# Altium PCB MainBoard.PcbDoc
Units mm, origin at the board's own origin, x right, y up, seen from the top; angles counter-clockwise.
Board outline 101.6 x 68.58 mm, 2 copper layers (Top Layer, Bottom Layer), stack 1.671 mm thick; 35 components, 28 nets, 96 pads, 11 vias.
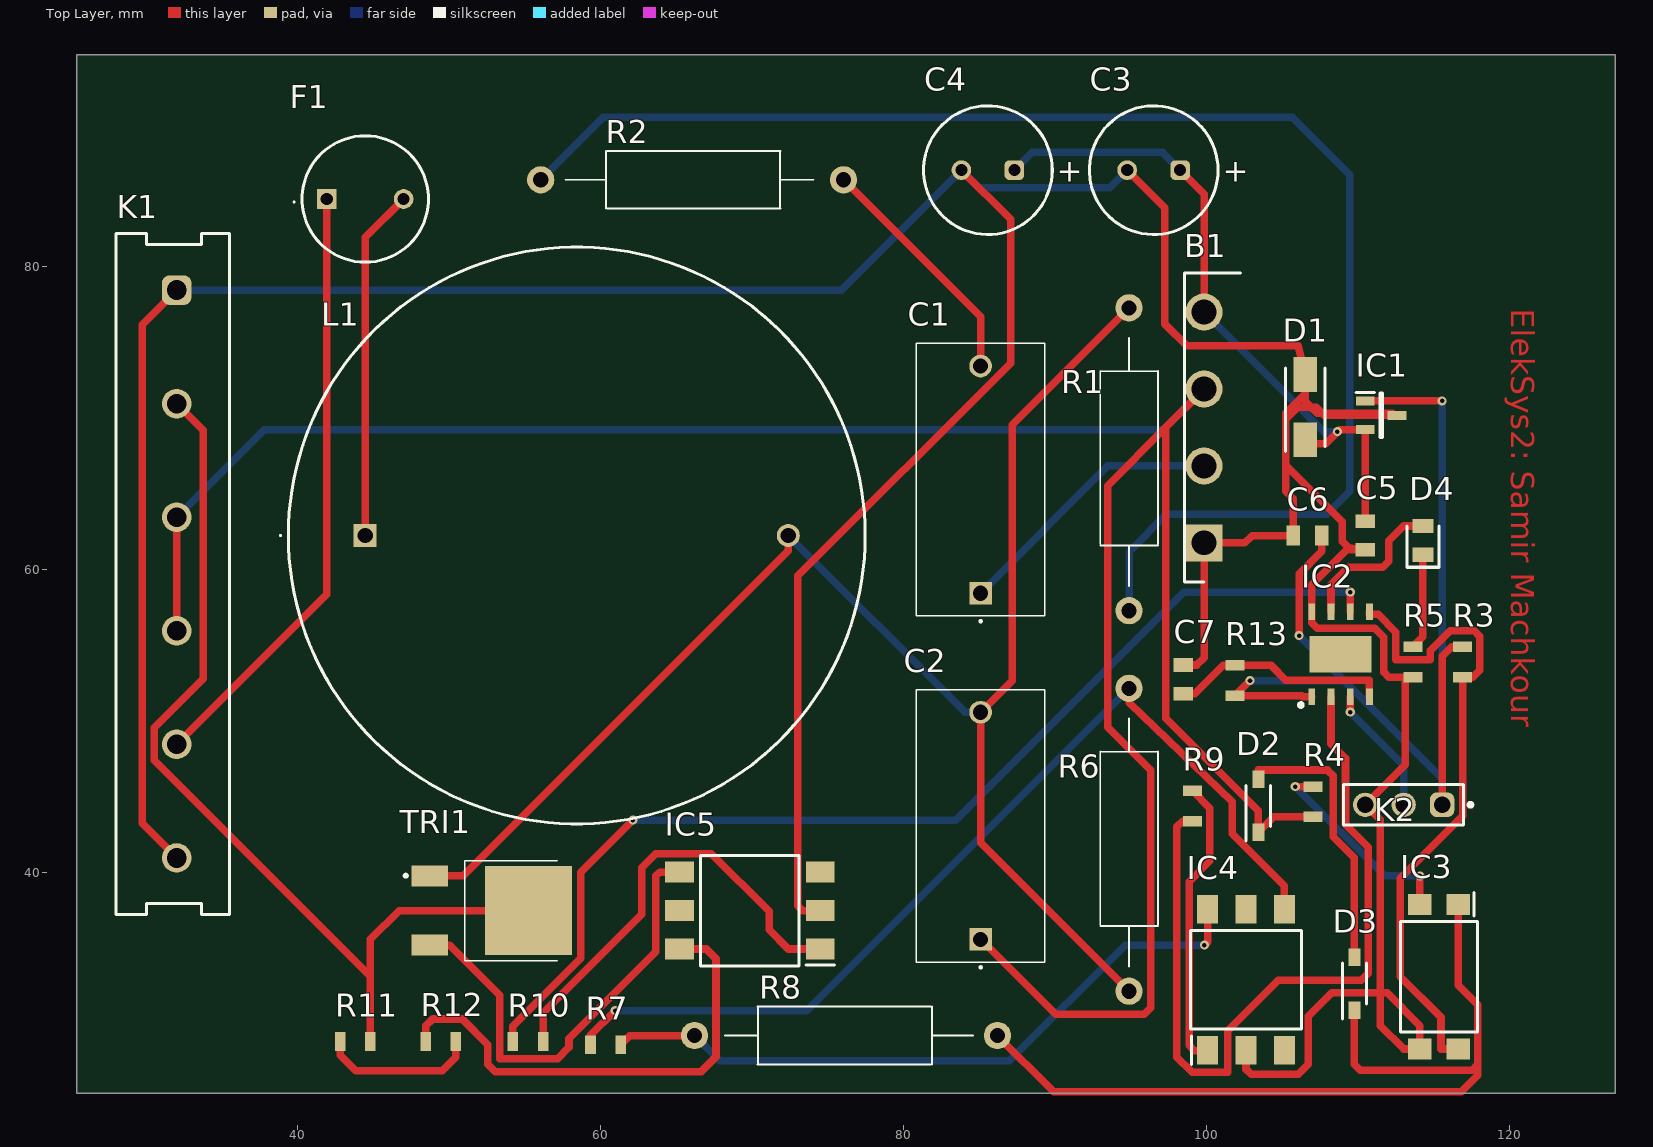
[diagram p0: Top Layer view]
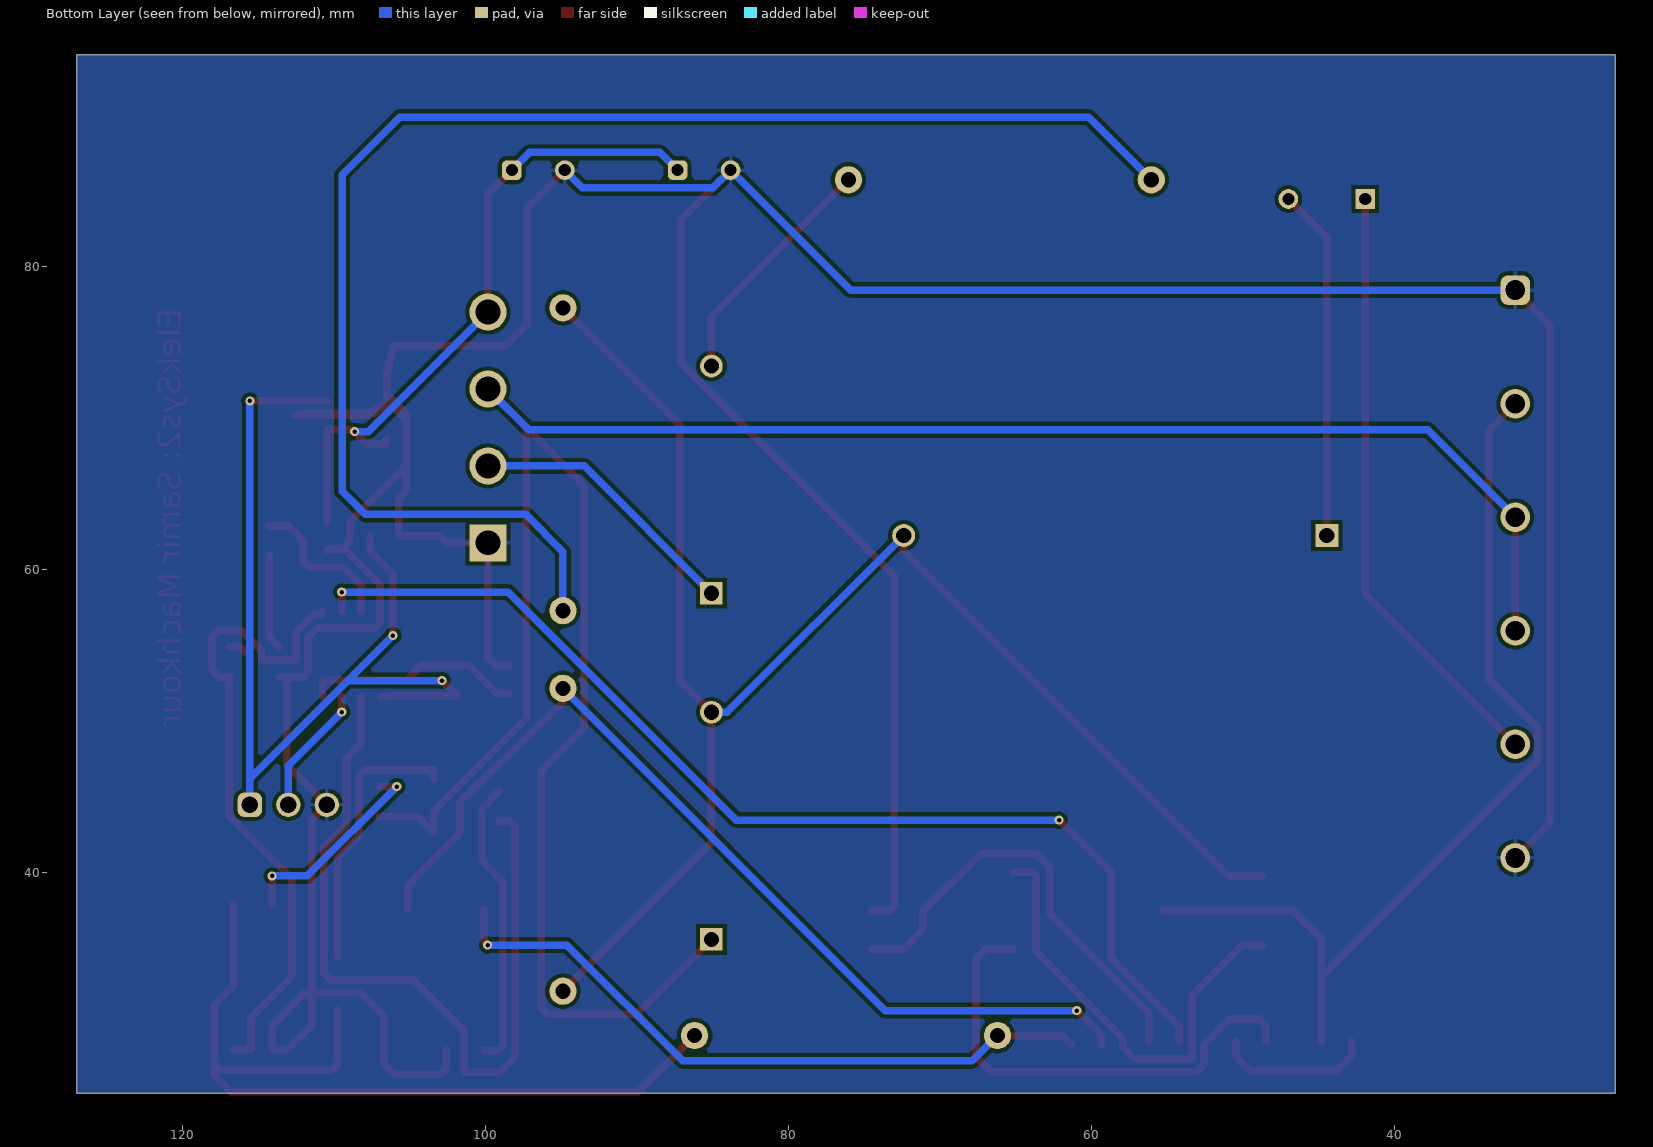
[diagram p1: Bottom Layer view, seen from below]
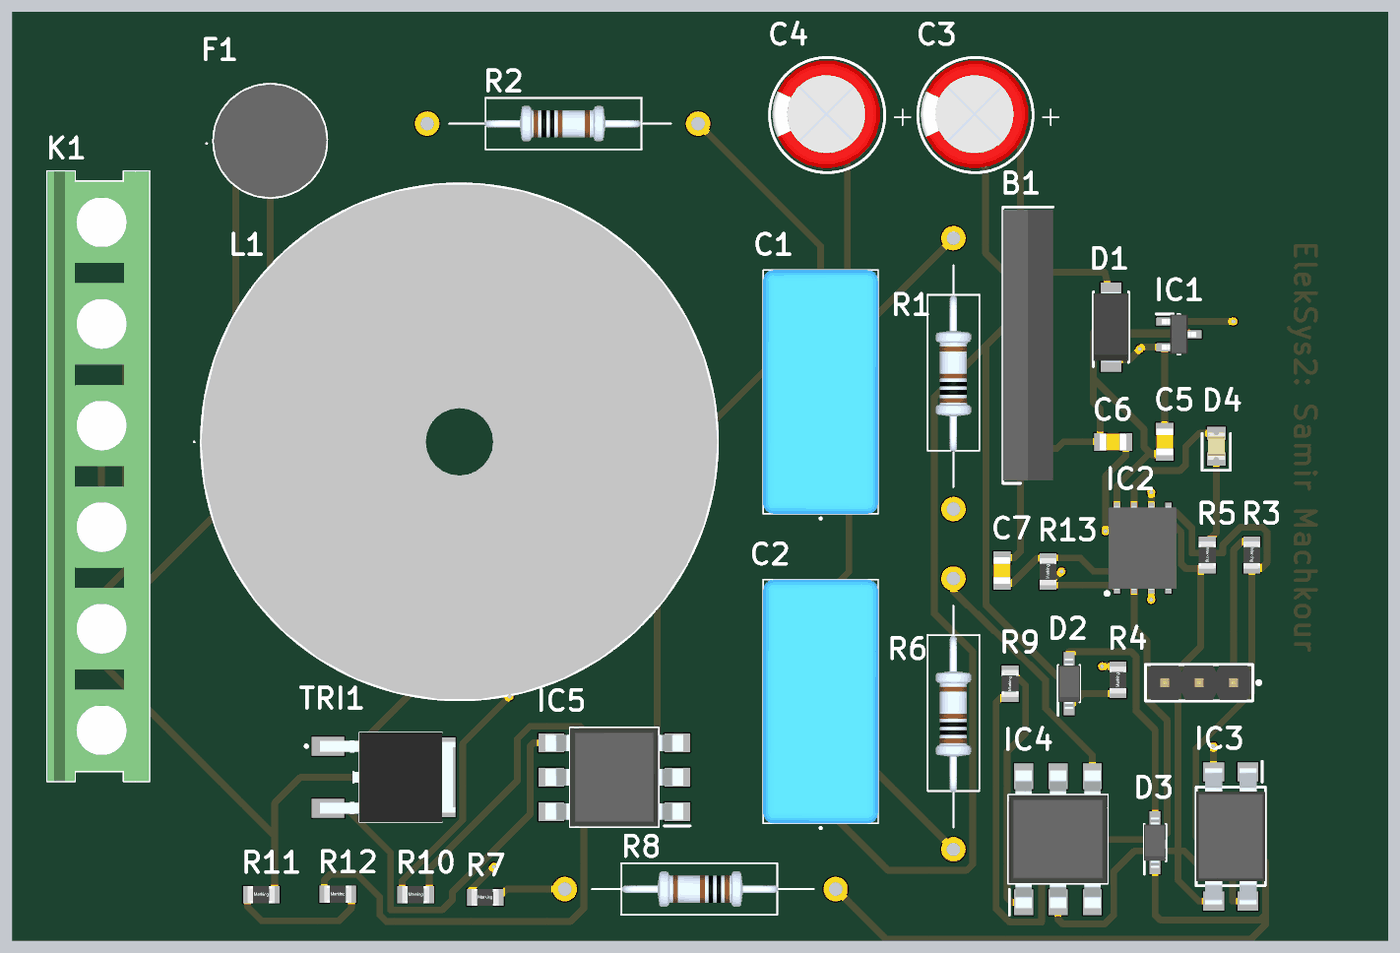
[diagram p2: 3D render of the assembled board from above, using the file's embedded part models]

## Layer stack, top to bottom
Top Solder: solder mask 0.0102, Solder Resist, Dk 3.5
Top Layer: signal copper 0.0356
Dielectric 1: dielectric 1.6, FR-4, Dk 4.8
Bottom Layer: signal copper 0.0356
Bottom Solder: solder mask 0.0102, Solder Resist, Dk 3.5

## Board outline
25.4,93.98 127,93.98 127,25.4 25.4,25.4

## Design rules (kind name [scope] priority, off if disabled: settings)
Clearance [All] p1: gap=0.254 ignorepadtopadclearanceinfootprint=FALSE except(0.3: Arc-Arc Arc-Track Track-Track)
PolygonConnect [All] p1: connectstyle=Relief reliefconductorwidth=0.254 reliefentries=4 polygonreliefangle="90 Angle" airgapwidth=0.254
RoutingVias [All] p1: holewidth=0.3 width=0.6 viastyle="Through Hole" minholewidth=0.3 minwidth=0.6 maxholewidth=0.3 maxwidth=0.6
SilkToSolderMaskClearance [IsPad] p1: minsilkscreentomaskgap=0.1 clearancetoexposedcopper=TRUE
SolderMaskExpansion [All] p1: expansion=0.102 istentingtop=FALSE
SupplyNets "Schematic Supply Nets_1" [InNet('GND')] p1: voltage=0.000
SupplyNets "Schematic Supply Nets" [InNet('+5')] p2: voltage=0.000
UnRoutedNet [All] p1: checkbadconnections=TRUE
Width [All] p1: maxlimit=1 minlimit=0.3 preferedwidth=0.5
28 further rules are at their usual default settings.

## Components (designator, comment, footprint, x,y, rotation, side; value= is the part's Value field where it differs from the comment)
B1 "" TO508P370X2000X1310-4P 99.847,61.747 r90 top
C1 "220N X2" B32932A_(18_x_8.5) 85.09,58.42 r90 top
C2 "220N X2" B32932A_(18_x_8.5) 85.09,35.56 r90 top
C3 "220uF" WCAP-ATG8_D8H11.5 96.52,86.36 r0 top
C4 "220uF" WCAP-ATG8_D8H11.5 85.57,86.36 r0 top
C5 "100nF" WCAP-CSGP_0805_L2W1.25H0.8_Reflow 110.49,62.23 r90 top
C6 "100nF" WCAP-CSGP_0805_L2W1.25H0.8_Reflow 106.68,62.23 r0 top
C7 "100nF" WCAP-CSGP_0805_L2W1.25H0.8_Reflow 98.476,52.73 r90 top
D1 "16V 0.5W" DIOM5226X220N 106.528,70.705 r90 top
D2 "0.5W 6.2V" "Zener Diodes ZEN REG 0.5W 6.2V" 103.429,44.376 r90 top
D3 "0.5W 6.2V" "Zener Diodes ZEN REG 0.5W 6.2V" 109.779,32.639 r90 top
D4 "LED GREEN" "LED 0805" 114.3,61.91 r90 top
F1 "FUSE" "FUSE MRT" 41.91,84.455 r0 top
IC1 "VOL REG" "Vol reg" 111.54,70.17 r0 top
IC2 "PIC12F629-I_MF" PIC12F629-I_MF 108.864,54.387 r90 top
IC3 "Optocoupler" "optocoupler smd" 115.367,33.096 r270 top
IC4 "optocoupler MOC3022S" "optoucoupler MOC3022S" 102.616,32.893 r90 top
IC5 "optocoupler MOC3022S" "optoucoupler MOC3022S" 69.85,37.465 r180 top
K1 "691137910006" 691137910006 31.75,59.69 r270 top
K2 "61300311121" "connector 3p M" 113.03,44.45 r180 top
L1 "2.2 mH" "2.2mH inductor" 44.45,62.23 r0 top
R1 "470 Ω 1W" RES_THT_1W 94.894,67.267 r90 top
R2 "470 Ω 1W" RES_THT_1W 66.04,85.725 r0 top
R3 "15K Ω" "Res 0805" 116.916,53.873 r270 top
R4 "10K Ω" "Res 0805" 107.036,44.653 r90 top
R5 "1k Ω" "Res 0805" 113.64,53.873 r270 top
R6 "15k Ω 1W" RES_THT_1W 94.894,42.139 r90 top
R7 "220k Ω" "Res 0805" 60.325,28.6 r0 top
R8 "15k Ω 1W" RES_THT_1W 76.2,29.21 r180 top
R9 "820 Ω" "Res 0805" 99.085,44.374 r90 top
R10 "820 Ω" "Res 0805" 55.194,28.804 r0 top
R11 "470 Ω" "Res 0805" 43.79,28.804 r0 top
R12 "470 Ω" "Res 0805" 49.438,28.829 r0 top
R13 "15k Ω" "Res 0805" 101.879,52.654 r90 top
TRI1 "BT137S-600,118" "triac bt137" 52.82,37.465 r270 top

## Footprints (in the part's own frame and the unit in brackets; to place one, negate y for a bottom-side part, rotate by r counter-clockwise, add the part's x,y. Pads: shape width x height; smd on the part's side, far side on the other; paste and mask are expansions set on the pad)
"2.2mH inductor" [mm] "1140222KRC"
  rect 1.519x1.519 hole 1.013: 1(0,0)
  round 1.519 hole 1.013: 2(27.94,0)
  silkscreen extent -5.65,-19.05 33.02,19.05, body extent -5.08,-19.05 33.02,19.05, height 26.14
691137910006 [mm] "Horizontal Cable Entry with Pressure Clamp, pitch 7.5mm, 06p"
  rrect50% 1.95x1.95 hole 1.3: 1(-18.75,0.25)
  round 1.95 hole 1.3: 2(-11.25,0.25) 3(-3.75,0.25) 4(3.75,0.25) 5(11.25,0.25) 6(18.75,0.25)
  silkscreen extent -22.5,-3.75 22.5,3.75, body extent -22.5,-3.75 22.5,3.75, height 11.52
B32932A_(18_x_8.5) [mm] "220N X2 safetycap"
  rect 1.5x1.5 hole 1: 1(0,0)
  round 1.5 hole 1: 2(15,0)
  silkscreen extent -1.9,-4.25 16.5,4.25, body extent -1.5,-4.25 16.5,4.25, height 14.55
"connector 3p M" [mm] "Pin Header, pitch 2.54 mm, THT, Vertical, single row, 3p"
  rrect50% 1.6x1.6 hole 1.1: 1(-2.54,0)
  round 1.6 hole 1.1: 2(0,0) 3(2.54,0)
  silkscreen extent -4.53,-1.34 3.96,1.34, body extent -3.81,-1.27 3.81,1.27, height 8.57
DIOM5226X220N [mm]
  rect 2.3x1.55 smd: 1(-2.15,0) 2(2.15,0)
  silkscreen extent -2.93,-1.3 2.6,1.3, body extent -2.61,-1.3 2.61,1.3, height 2.2
"FUSE MRT" [mm] "MRT16AMMO"
  rect 1.3x1.3 hole 0.8: 1(0,0)
  round 1.3 hole 0.8: 2(5.08,0)
  silkscreen extent -2.2,-4.18 6.71,4.18, body extent -1.62,-4.18 6.7,4.18, height 8
"LED 0805" [mm] "LEDC2012X80N"
  rect 0.95x1.4 smd: 1(-0.95,0) 2(0.95,0)
  silkscreen extent -1.77,-1.05 0.95,1.05, body extent -1,-0.63 1,0.63, height 0.8
"optocoupler smd" [mm] "SOP254P1005X410-4N"
  rect 1.4x1.55 smd: 1(-4.775,1.27) 2(-4.775,-1.27) 3(4.775,-1.27) 4(4.775,1.27)
  silkscreen extent -5.55,-2.55 3.65,2.55, body extent -5.02,-2.55 5.02,2.55, height 4.1
"optoucoupler MOC3022S" [mm] "SOT254P1016X460-6N"
  rect 1.9x1.4 smd: 1(-4.65,2.54) 2(-4.65,0) 3(-4.65,-2.54) 4(4.65,-2.54) 5(4.65,0) 6(4.65,2.54)
  silkscreen extent -5.6,-3.65 3.25,3.65, body extent -5.08,-3.65 5.08,3.65, height 4.6
PIC12F629-I_MF [mm] "SON127P600X500X100-9N-D"
  rect 1.1x0.45 smd: 1(-2.8,1.905) 2(-2.8,0.635) 3(-2.8,-0.635) 4(-2.8,-1.905) 5(2.8,-1.905) 6(2.8,-0.635) 7(2.8,0.635) 8(2.8,1.905)
  rect 2.4x4.1 smd: 9(0,0)
  silkscreen extent -3.47,2.5 -3.23,2.75, body extent -3.05,-2.5 3.05,2.5, height 1
"Res 0805" [mm] "Thick Film Resistors, SMT, body size 2x1.25mm"
  rect 0.7x1.25 smd: 1(-1,0) 2(1,0)
  body extent -1,-0.62 1,0.63, height 0.6
RES_THT_1W [mm]
  round 1.8 hole 1: 1(-10,0) 2(10,0)
  silkscreen extent -8.38,-1.91 8,1.91, body extent -5.77,-1.3 5.77,1.3, height 2.6
TO508P370X2000X1310-4P [mm]
  rect 2.445x2.445 hole 1.63: 1(0,0)
  round 2.445 hole 1.63: 2(5.08,0) 3(10.16,0) 4(15.24,0)
  silkscreen extent -2.58,-2.4 17.82,1.3, body extent -2.38,-2.4 17.62,1.3, height 13.1
"triac bt137" [mm] "BT137S600118"
  rect 1.4x2.4 smd: 1(-2.285,-4.1) 3(2.285,-4.1)
  rect 5.9x5.75 smd: 2(0,2.425)
  silkscreen extent -3.3,-5.79 3.3,4.31, body extent -3.3,-4.69 3.3,5.31, height 2.38
"Vol reg" [mm] "SOT95P237X112-3N"
  rect 1.25x0.6 smd: 1(-1.05,0.95) 2(-1.05,-0.95) 3(1.05,0)
  silkscreen extent -1.67,-1.46 0.08,1.5, body extent -1.27,-1.46 1.27,1.46, height 1
WCAP-ATG8_D8H11.5 [mm] "Aluminum Electrolytic Capacitors, 8x11.5mm"
  rrect50% 1.3x1.3 hole 0.8: 1(1.75,0)
  round 1.3 hole 0.8: 2(-1.75,0)
  silkscreen extent -4.25,-4.25 4.25,4.25, body extent -4.05,-3.93 3.94,4.06, height 11.81
WCAP-CSGP_0805_L2W1.25H0.8_Reflow [mm] "Ceramic Capacitors, body 2x1.25mm"
  rect 0.9x1.3 smd: 1(-0.95,0) 2(0.95,0)
  body extent -1,-0.62 1,0.63, height 0.8
"Zener Diodes ZEN REG 0.5W 6.2V" [mm] "SOD3716X135N"
  rect 1.15x0.8 smd: 1(-1.75,0) 2(1.75,0)
  silkscreen extent -2.32,-0.8 1.35,0.8, body extent -1.86,-0.8 1.86,0.8, height 1.35

## Part data
B1: library part GBUA10M-BP, "Bridge Rectifier GBUA10M-BP", Manufacturer_Name=MCC, Datasheet Link=https://www.mccsemi.com/pdf/Products/GBUA10M(JC).pdf, Height=3.7mm, Manufacturer_Part_Number=GBUA10M-BP
C1 C2: library part "220N X2 safetycap", "Capacitor B32932A3224K189", Manufacturer_Name=TDK, Manufacturer_Part_Number=B32932A3224K189, Mouser Part Number=871-B32932A3224K189, Datasheet Link=https://product.tdk.com/system/files/dam/doc/product/capacitor/film/emi/data_sheet/20/20/ds/mkt_b32932_936.pdf, Mouser Price/Stock=https://www.mouser.co.uk/ProductDetail/EPCOS-TDK/B32932A3224K189?qs=xUjyHVpcJwaD87vZwqy58g%3D%3D
C3 C4: library part "Elco D8-H11.5", "WCAP-ATG8 Aluminum Electrolytic Capacitor, Radial, THT, D8 x H11.5mm, 220uF, 35V", Capacitance Tolerance=+/-20%, Leakage Current=77uA, Manufacturer="Wurth Elektronik", Manufacturer Part Number=860010574011, Operating Temperature Max=85°C, Operating Temperature Min=-40°C, Rated Voltage (DC)=35V, Ripple Current=385mA, Capacitance=220uF, Category="Aluminum Electrolytic Capacitors", ComponentLink1Description="Website Link", ComponentLink1URL=https://www.we-online.com/redexpert/article/860010574011?ad, ComponentLink2Description="Datasheet Link", ComponentLink2URL=https://www.we-online.com/redexpert/spec/860010574011?ad, Diameter=8mm, Dissipation Factor=12%, Endurance=2000h, Height=11.5mm, Match Code=WCAP-ATG8, Mount="Through Hole", Packaging="Ammo Pack", Technical Reference=ATBE115221M035DSPA7B000
C5 C6 C7: library part "CeramicCap 0805", "WCAP-CSGP Multilayer Ceramic Chip Capacitor, General Purpose, size 0805, X7R, 100nF, 50VDC", Capacitance Tolerance=+/-10%, Case/Size Code=0805, Insulation Resistance=5GOhm, Manufacturer="Wurth Elektronik", Manufacturer Part Number=885012207098, Operating Temperature Max=125°C, Operating Temperature Min=-55°C, Rated Voltage (DC)=50V, Capacitance=100nF, Category="Multilayer Ceramic Chip Capacitors", Ceramic Type=X7R, ComponentLink1Description="Website Link", ComponentLink1URL=https://www.we-online.com/redexpert/article/885012207098?ad, ComponentLink2Description="Datasheet Link", ComponentLink2URL=https://www.we-online.com/redexpert/spec/885012207098?ad, Dissipation Factor=2.5%, Height=0.8mm, Length=2mm, Match Code=WCAP-CSGP, Mount="Surface Mount", Packaging="Tape and Reel", Technical Reference=X7R0805104K050DFCT10000, Width=1.25mm
D1: library part "Zener 16V 0.5W", "Zener Diode / SZ1SMA5930BT3G", Arrow Part Number=SZ1SMA5930BT3G, Manufacturer_Name=onsemi, Mouser Part Number=863-SZ1SMA5930BT3G, Arrow Price/Stock=https://www.arrow.com/en/products/sz1sma5930bt3g/on-semiconductor, Datasheet Link=https://www.onsemi.com/pub/Collateral/1SMA5913BT3-D.PDF, Height=2.2mm, Manufacturer_Part_Number=SZ1SMA5930BT3G, Mouser Price/Stock=https://www.mouser.co.uk/ProductDetail/onsemi/SZ1SMA5930BT3G?qs=PJJcWtbOkNU2Dey35wiGFw%3D%3D
D2 D3: library part "Zener Diodes ZEN REG 0.5W 6.2V", "Zener Diode / SZMMSZ4691T1G", Arrow Part Number=SZMMSZ4691T1G, Manufacturer_Name=onsemi, Mouser Part Number=863-SZMMSZ4691T1G, Arrow Price/Stock=https://www.arrow.com/en/products/szmmsz4691t1g/on-semiconductor?region=nac, Datasheet Link=https://componentsearchengine.com/Datasheets/2/SZMMSZ4691T1G.pdf, Height=1.35mm, Manufacturer_Part_Number=SZMMSZ4691T1G, Mouser Price/Stock=https://www.mouser.co.uk/ProductDetail/onsemi/SZMMSZ4691T1G?qs=PJJcWtbOkNVmtHltI2Mc2w%3D%3D
D4: "LED HSMG-C170", Manufacturer_Name="Avago Technologies", Manufacturer_Part_Number=HSMG-C170, Mouser Part Number=630-HSMG-C170, Datasheet Link=https://datasheet.datasheetarchive.com/originals/distributors/SFDatasheet-4/sf-00083853.pdf, Height=0.8mm, Mouser Price/Stock=https://www.mouser.co.uk/ProductDetail/Broadcom-Avago/HSMG-C170?qs=YDL0qNrpDT4lm8ArMPkMEA%3D%3D
F1: library part "FUSE MRT_1.6_AMMO", "Fuse MRT_1.6_AMMO", Arrow Part Number="MRT 1.6 AMMO", Manufacturer_Name=BelFuse, Mouser Part Number=530-MRT1.6AMMO, Arrow Price/Stock=https://www.arrow.com/en/products/mrt1.6-ammo/bel-group, Datasheet Link=https://www.belfuse.com/resources/datasheets/circuitprotection/ds-cp-mrt-series.pdf, Height=7.9mm, Manufacturer_Part_Number="MRT 1.6 AMMO", Mouser Price/Stock=https://www.mouser.co.uk/ProductDetail/Bel-Fuse/MRT-16-AMMO?qs=MvPYbBWWJyvzAphvU3%252BjhQ%3D%3D
IC1: "Integrated Circuit LM3480IM3X-5.0_NOPB", Arrow Part Number=LM3480IM3X-5.0/NOPB, Manufacturer_Name="Texas Instruments", Mouser Part Number=926-LM3480IM3X50NOPB, Arrow Price/Stock=https://www.arrow.com/en/products/lm3480im3x-5.0nopb/texas-instruments?region=nac, Datasheet Link=http://www.ti.com/lit/gpn/LM3480, Height=1.12mm, Manufacturer_Part_Number=LM3480IM3X-5.0/NOPB, Mouser Price/Stock=https://www.mouser.co.uk/ProductDetail/Texas-Instruments/LM3480IM3X-5.0-NOPB?qs=X1J7HmVL2ZHSOja%2Fw1xDFA%3D%3D
IC2: "Integrated Circuit", Arrow Part Number=PIC12F629-I/MF, Manufacturer_Name=Microchip, Mouser Part Number=579-PIC12F629-I/MF, Arrow Price/Stock=https://www.arrow.com/en/products/pic12f629-imf/microchip-technology, Datasheet Link=http://ww1.microchip.com/downloads/en/DeviceDoc/41190G.pdf, Height=1mm, Manufacturer_Part_Number=PIC12F629-I/MF, Mouser Price/Stock=https://www.mouser.co.uk/ProductDetail/Microchip-Technology-Atmel/PIC12F629-I-MF?qs=Ux5rHyN1IXRyFoXTct%252B9Fg%3D%3D
IC3: library part "optocoupler smd", "Inductor SFH6206-3T", Arrow Part Number=SFH6206-3T, Manufacturer_Name=Vishay, Mouser Part Number=782-SFH6206-3T, Arrow Price/Stock=https://www.arrow.com/en/products/sfh6206-3t/vishay?region=europe, Datasheet Link=https://www.vishay.com/docs/83675/sfh620a.pdf, Height=4.1mm, Manufacturer_Part_Number=SFH6206-3T, Mouser Price/Stock=https://www.mouser.co.uk/ProductDetail/Vishay-Semiconductors/SFH6206-3T?qs=%2Fjqivxn91cfcfJy%252Bpwis%2Fw%3D%3D
IC4 IC5: "integrated circuit", Arrow Part Number=MOC3022S, Manufacturer_Name=Lite-On, Mouser Part Number=859-MOC3022S, Arrow Price/Stock=https://www.arrow.com/en/products/moc3022s/lite-on-technology, Datasheet Link=http://optoelectronics.liteon.com/upload/download/DS-70-99-0019/MOC302X%20series%20201606.pdf, Height=4.6mm, Manufacturer_Part_Number=MOC3022S, Mouser Price/Stock=https://www.mouser.co.uk/ProductDetail/Lite-On/MOC3022S?qs=Xz6ZzMsXYiMGEjhojNzjUw%3D%3D
K1: library part connector, NexarPartId=105950641
K2: library part "3P connector", "WR-PHD Pin Header, THT, Vertical, pitch 2.54mm, 1 Row, 3P 61300311121", Contact Resistance=20mOhm, Manufacturer="Wurth Elektronik", Operating Temperature Max=105°C, Operating Temperature Min=-40°C, Rated Current=3A, Withstanding Voltage=500V, Working Voltage=250V, Category="Board-to-Board Connectors", ComponentLink1Description="Website Link", ComponentLink1URL=https://www.we-online.com/redexpert/article/61300311121?ad, ComponentLink2Description="Datasheet Link", ComponentLink2URL=https://www.we-online.com/redexpert/spec/61300311121?ad, Gender="Pin Header", Manufacturer Part Number=61300311121, Match Code=WR-PHD, Mount="Through Hole", Number of Pins=3, Number of Rows=1, Orientation=Vertical, Packaging=Bag, Pitch=2.54mm
L1: library part "2mH2 inductor", "Inductor  1140-222k-sc / 140-222K-RC", Arrow Part Number=1140-222K-RC, Manufacturer_Name=Bourns, Mouser Part Number=542-1140-222K-RC, Arrow Price/Stock=https://www.arrow.com/en/products/1140-222k-rc/bourns, Datasheet Link=http://www.bourns.com/docs/Product-Datasheets/1140_series.pdf, Height=26.162mm, Manufacturer_Part_Number=1140-222K-RC, Mouser Price/Stock=https://www.mouser.co.uk/ProductDetail/Bourns/1140-222K-RC?qs=oBhrY4n2hVwJtcTK7vYUOQ%3D%3D
R1 R2 R6 R8: library part "Resistor THT 1W", Case/Size Code=0805, Manufacturer="Wurth Elektronik", Manufacturer Part Number=560050320001, Operating Temperature Max=155°C, Operating Temperature Min=-55°C, Rated Current=1.81A, Rated Power=0.33W, Resistance=0.1Ω, Resistance Tolerance=+/-1%, Temperature Coefficient of Resistance=250ppm/°C, Category="Thick Film Resistors", ComponentLink1Description="Website Link", ComponentLink1URL=https://www.we-online.com/redexpert/article/560050320001?ad, ComponentLink2Description="Datasheet Link", ComponentLink2URL=https://www.we-online.com/redexpert/spec/560050320001?ad, Height=0.6mm, Length=2mm, Match Code=WRIS-KSKE, Mount="Surface Mount", Packaging="Tape and Reel", Technical Reference=KE0805R100F103LAATP0000, Width=1.25mm
R3 R4 R5 R7 R9 R10 R11 R12 R13: library part "Resistor 0805", "WRIS-KSKE Thick Film Resistor, SMT, size 0805, 0.33W, 0.1Ω, +/-1%", Case/Size Code=0805, Manufacturer="Wurth Elektronik", Manufacturer Part Number=560050320001, Operating Temperature Max=155°C, Operating Temperature Min=-55°C, Rated Current=1.81A, Rated Power=0.33W, Resistance=0.1Ω, Resistance Tolerance=+/-1%, Temperature Coefficient of Resistance=250ppm/°C, Category="Thick Film Resistors", ComponentLink1Description="Website Link", ComponentLink1URL=https://www.we-online.com/redexpert/article/560050320001?ad, ComponentLink2Description="Datasheet Link", ComponentLink2URL=https://www.we-online.com/redexpert/spec/560050320001?ad, Height=0.6mm, Length=2mm, Match Code=WRIS-KSKE, Mount="Surface Mount", Packaging="Tape and Reel", Technical Reference=KE0805R100F103LAATP0000, Width=1.25mm
TRI1: library part "triac BT137S-600,118", "Triac BT137S-600,118", Manufacturer_Name="WeEn Semiconductors", Mouser Part Number=771-BT137S-600118, Arrow Part Number=BT137S-600,118, Arrow Price/Stock=https://www.arrow.com/en/products/bt137s-600118/ween-semiconductors?region=nac, Datasheet Link=https://datasheet.datasheetarchive.com/originals/distributors/Datasheets_SAMA/6f648ac3c87a35283db8e9482e52c049.pdf, Height=2.38mm, Manufacturer_Part_Number=BT137S-600,118, Mouser Price/Stock=https://www.mouser.co.uk/ProductDetail/WeEn-Semiconductors/BT137S-600118?qs=me8TqzrmIYXlu%252B8KdpBmXQ%3D%3D

## Via types
v1: diameter 0.6, hole 0.3, Top Layer to Bottom Layer, 11 vias

## Nets (pads, with @x,y where several pads share a name; then routed paths per layer and width w, separated by ;. In a path a pad name is that pad's centre, name@x,y a point inside that pad or via, vN(x,y) a via of type N, cw(c..) or ccw(c..) an arc to the next point about the centre after c; other vN are vias at no path point)
+5: C6.2 IC1.1 IC2.1 K2.1 R3.1 R13.1 | length 76.5
  Top Layer w0.5: v1(102.879,52.654) R13.1 106.282,51.654 106.349,51.587 IC2.1 ; v1(106.121,55.626) 106.121,59.69 107.63,61.199 C6.2 ; IC1.1 v1(115.57,71.12) ; K2.1 115.57,53.873 115.589,53.892 115.589,54.257 116.205,54.873 R3.1
  Bottom Layer w0.5: v1(102.879,52.654) 109.093,52.654 ; v1(106.121,55.626) 109.093,52.654 ; K2.1 115.57,46.177 ; v1(115.57,71.12) 115.57,46.177 ; 109.093,52.654 115.57,46.177
A/K_IC3: D3.1 IC3.1 R8.1 | length 57.6
  Top Layer w0.5: R8.1 89.908,25.502 116.84,25.502 117.932,26.594 117.932,27.305 ; D3.1 109.779,27.305 110.16,26.924 117.551,26.924 117.932,27.305 ; IC3.1 116.637,32.537 117.932,31.242 117.932,27.305
ANODE_IC4: IC2.2 R9.1 | length 53.1
  Top Layer w0.5: R9.1 98.425,43.374 98.044,42.993 98.044,27.788 99.06,26.772 101.397,26.772 101.397,29.527 104.737,32.868 110.213,32.868 110.683,33.337 110.683,41.658 109.186,43.155 109.186,47.523 108.229,48.48 IC2.2
ANODE_IC5: IC2.6 R10.1 | length 72.8
  Top Layer w0.5: R10.1 54.194,29.836 58.673,34.314 58.673,39.978 v1(62.128,43.434) ; IC2.6 v1(109.499,58.496)
  Bottom Layer w0.5: v1(62.128,43.434) 83.439,43.434 98.501,58.496 v1(109.499,58.496)
GND: B1.1 C3.2 C4.2 C5.1 C6.1 C7.2 D1.2 IC1.3 IC2.8 IC3.3 IC4.2 IC5.2 K1.1 K1.6 K2.3 R5.2 | length 299.6
  Top Layer w0.5: K1.6 29.721,43.219 29.721,76.161 K1.1 ; IC5.2 73.343,37.465 73.025,37.782 73.025,59.563 87.071,73.609 87.071,83.109 C4.2 ; C3.2 97.257,83.873 97.257,76.2 98.704,74.752 106.07,74.752 D1.2 106.528,71.603 ; C7.2 99.377,53.68 99.847,54.15 B1.1 102.54,61.747 103.022,62.23 C6.1 105.73,64.643 105.232,65.141 105.232,66.878 ; IC4.2 102.616,26.987 102.959,26.645 106.07,26.645 106.731,27.305 106.731,30.48 108.28,32.029 111.483,32.029 ; IC1.3 IC1.3@112.268,70.17 ; R5.2 R5.2@113.132,52.873 ; 105.232,66.878 105.232,69.901 ; 105.232,66.878 108.966,63.144 108.966,61.851 109.404,61.413 ; 105.232,69.901 105.232,70.307 106.528,71.603 ; 105.232,69.901 106.045,70.714 106.909,70.714 ; 106.528,71.603 106.528,71.095 106.909,70.714 ; 106.909,70.714 107.315,70.307 107.66,70.307 ; 106.909,70.714 107.254,70.714 107.66,70.307 ; 107.66,70.307 112.268,70.307 IC1.3@112.268,70.17 ; 107.66,70.307 107.798,70.17 IC1.3@112.268,70.17 ; 109.404,61.413 109.537,61.28 C5.1 109.404,61.413 ; 109.404,61.413 106.959,58.968 IC2.8 106.959,56.464 107.315,56.109 111.125,56.109 111.711,55.523 111.711,53.219 112.057,52.873 R5.2@113.132,52.873 ; 111.483,32.029 111.938,32.029 114.097,29.87 IC3.3 113.03,28.321 111.483,29.868 111.483,32.029 ; 111.483,32.029 111.483,43.457 K2.3 113.132,47.092 R5.2@113.132,52.873
  Bottom Layer w0.5: K1.1 75.9,78.44 C4.2 84.988,85.192 93.602,85.192 C3.2
GP2_IC2: IC2.5 IC3.4 R3.2 | length 43.1
  Top Layer w0.5: IC2.5 110.769,57.023 111.342,57.023 112.511,55.854 112.511,54.019 114.783,54.019 114.783,54.61 116.103,55.931 117.691,55.931 118.059,55.562 118.059,53.34 117.593,52.873 R3.2 116.916,43.713 112.801,39.599 112.801,33.096 115.494,30.404 115.494,28.321 IC3.4
GP3_IC2: C7.1 IC2.4 R13.2 | length 14.6
  Top Layer w0.5: C7.1 99.238,51.78 101.112,53.654 R13.2 104.267,53.654 105.242,52.68 110.769,52.68 IC2.4
GP4_IC2: IC2.3 K2.2 | length 8.6
  Top Layer w0.5: v1(109.499,50.571) IC2.3
  Bottom Layer w0.5: v1(109.499,50.571) 113.03,47.041 K2.2
K/A_IC3: IC3.2 R4.2 | length 13.7
  Top Layer w0.5: v1(105.867,45.653) R4.2 ; IC3.2 v1(114.097,39.751)
  Bottom Layer w0.5: v1(105.867,45.653) 111.769,39.751 v1(114.097,39.751)
"MAIN TERMINAL_1_IC4": IC4.4 R6.2 R7.1 | length 64.6
  Top Layer w0.5: R7.1 59.325,29.226 v1(60.96,30.861) ; R6.2 94.894,51.193 101.703,44.638 101.703,42.545 105.156,39.092 IC4.4
  Bottom Layer w0.5: v1(60.96,30.861) 73.617,30.861 R6.2
"MAIN TERMINAL_1_IC5": IC5.4 TRI1.3 | length 30.4
  Top Layer w0.5: TRI1.3 50.038,35.18 53.34,31.878 53.34,27.675 57.15,27.675 57.905,28.429 57.905,29.011 63.649,34.755 63.649,39.748 63.906,40.005 IC5.4
"MAIN TERMINAL_2_IC4": IC4.6 R7.2 R8.2 | length 45.1
  Top Layer w0.5: R7.2 61.935,29.21 R8.2 ; v1(99.873,35.179) 100.076,35.382 IC4.6
  Bottom Layer w0.5: R8.2 67.876,27.534 86.995,27.534 94.64,35.179 v1(99.873,35.179)
MAIN_TERMINAL_2_IC5: IC5.6 R12.1 | length 32.2
  Top Layer w0.5: R12.1 48.438,29.845 48.895,30.302 50.851,30.302 52.54,28.613 52.54,27.305 53.023,26.822 66.624,26.822 67.615,27.813 67.615,34.29 66.98,34.925 IC5.6
NetB1_2: B1.2 C1.1 | length 18.2
  Bottom Layer w0.5: C1.1 93.497,66.827 B1.2
NetB1_3: B1.3 C2.1 D2.1 K1.3 K1.4 R4.1 | length 170.3
  Top Layer w0.5: K1.4 K1.3 ; C2.1 90.043,30.607 95.885,30.607 96.317,31.039 96.317,46.736 93.472,49.581 93.472,65.532 97.307,69.367 ; B1.3 97.307,69.367 ; R4.1 104.456,43.653 D2.1 103.429,44.044 97.307,50.165 97.307,69.367
  Bottom Layer w0.5: K1.3 37.775,69.215 97.155,69.215 B1.3
NetB1_4: B1.4 C3.1 C4.1 C5.2 D1.1 IC1.2 | length 44.9
  Top Layer w0.5: C3.1 99.847,84.783 B1.4 ; D1.1 106.528,68.288 107.886,68.288 v1@108.819,69.22 ; v1(108.656,69.088) v1@108.819,69.22 ; C5.2 IC1.2 v1@108.819,69.22
  Bottom Layer w0.5: C4.1 88.488,87.528 97.102,87.528 C3.1 ; B1.4 107.747,69.088 v1(108.656,69.088)
NetC1_2: C1.2 R2.2 | length 16.1
  Top Layer w0.5: R2.2 85.09,76.675 C1.2
NetC2_2: C2.2 L1.2 R1.2 R6.1 TRI1.1 | length 104.4
  Top Layer w0.5: TRI1.1 50.927,39.75 72.39,61.213 L1.2 ; R6.1 85.09,41.943 C2.2 87.173,52.643 87.173,69.546 R1.2
  Bottom Layer w0.5: L1.2 84.06,50.56 C2.2
NetD2_2: D2.2 D3.2 | length 18.3
  Top Layer w0.5: D2.2 103.429,46.745 107.996,46.745 108.386,46.355 108.386,42.346 109.779,40.953 D3.2
NetD4_1: D4.1 R5.1 | length 6.4
  Top Layer w0.5: R5.1 114.3,55.534 D4.1
NetD4_2: D4.2 IC2.7 | length 10.3
  Top Layer w0.5: IC2.7 108.229,58.979 109.372,60.122 111.633,60.122 112.039,60.528 112.039,61.869 113.03,62.86 D4.2
NetF1_1: F1.1 K1.5 | length 40.1
  Top Layer w0.5: K1.5 41.91,58.35 F1.1
NetF1_2: F1.2 L1.1 | length 23.3
  Top Layer w0.5: L1.1 44.45,81.915 F1.2
NetIC4_1: IC4.1 R9.2 | length 19.2
  Top Layer w0.5: R9.2 100.228,44.231 100.228,40.742 98.857,39.37 98.857,28.575 99.212,28.219 100.076,28.219 IC4.1
NetIC5_1: IC5.1 R10.2 | length 29.7
  Top Layer w0.5: R10.2 56.194,30.704 62.7,37.21 62.7,40.297 63.627,41.224 67.31,41.224 71.12,37.414 71.12,36.195 72.39,34.925 IC5.1
NetK1_2: K1.2 R11.2 TRI1.2 | length 63.8
  Top Layer w0.5: K1.2 33.757,69.183 33.757,52.766 30.521,49.53 30.521,47.406 44.79,33.138 ; R11.2 44.79,33.138 ; TRI1.2 46.695,37.465 44.79,35.56 44.79,33.138
NetR1_1: R1.1 R2.1 | length 97.8
  Bottom Layer w0.5: R2.1 60.18,89.865 105.664,89.865 109.474,86.055 109.474,65.151 107.95,63.627 97.358,63.627 94.894,61.163 R1.1
NetR11_1: R11.1 R12.2 | length 10.4
  Top Layer w0.5: R11.1 42.79,27.899 43.815,26.873 49.53,26.873 50.438,27.781 R12.2
pads on no net: IC2.9 IC4.3 IC4.5 IC5.3 IC5.5

## Polygon pours and split planes (outlines as drawn)
GND on Bottom Layer "GND_L02_P000" (solid, pour order 0): 25.4,25.4 127,25.4 127,93.98 25.4,93.98

## Other copper
Top Layer:
  text "ElekSys2: Samir Machkour" at 120.142,77.216 h1.52 r270

## Text inside footprints (layer, text, board x,y; h text height)
C3: Top Overlay "+" at 101.07,85.61 h1.5
C4: Top Overlay "+" at 90.12,85.61 h1.5